# Altium PCB T7.PcbDoc
Units mm, origin at the board's own origin, x right, y up, seen from the top; angles counter-clockwise.
Board outline 152.4 x 101.6 mm, 2 copper layers (Top Layer, Bottom Layer); 35 components, 52 nets, 226 pads, 10 vias.
Unrouted connection lines stored in the file: 1.
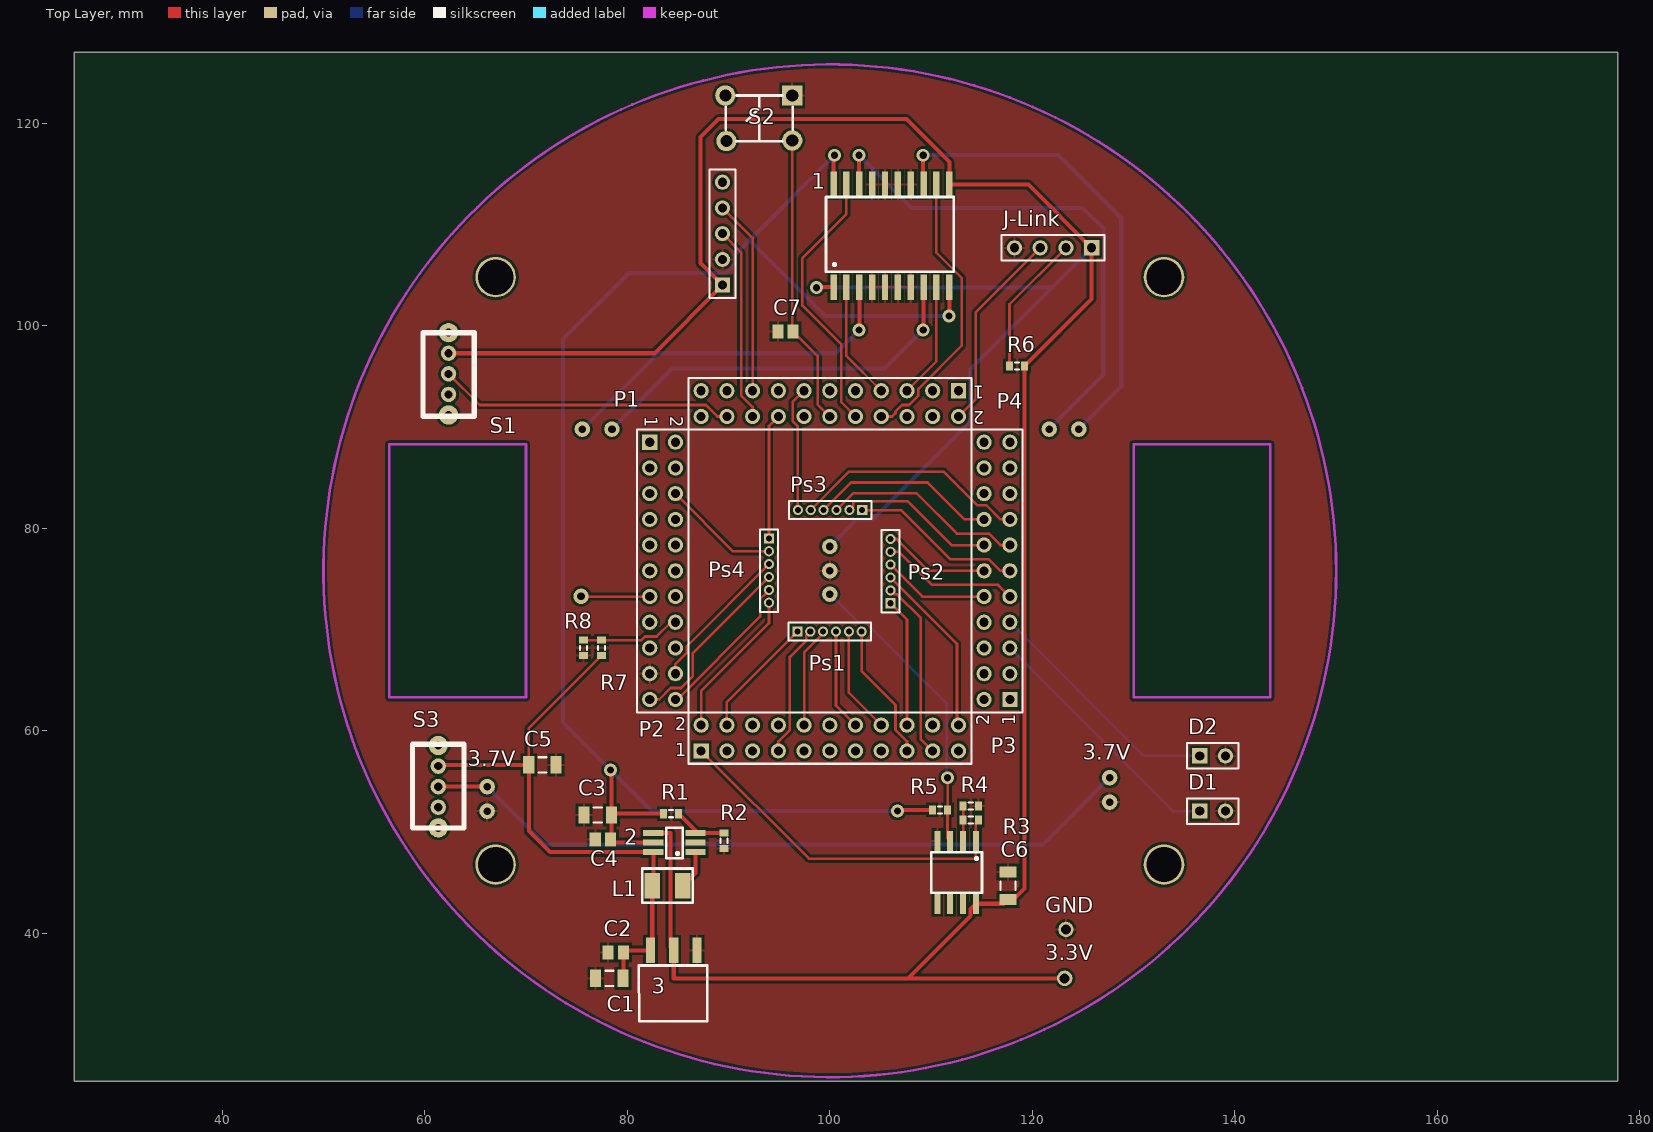
[diagram p0: Top Layer view]
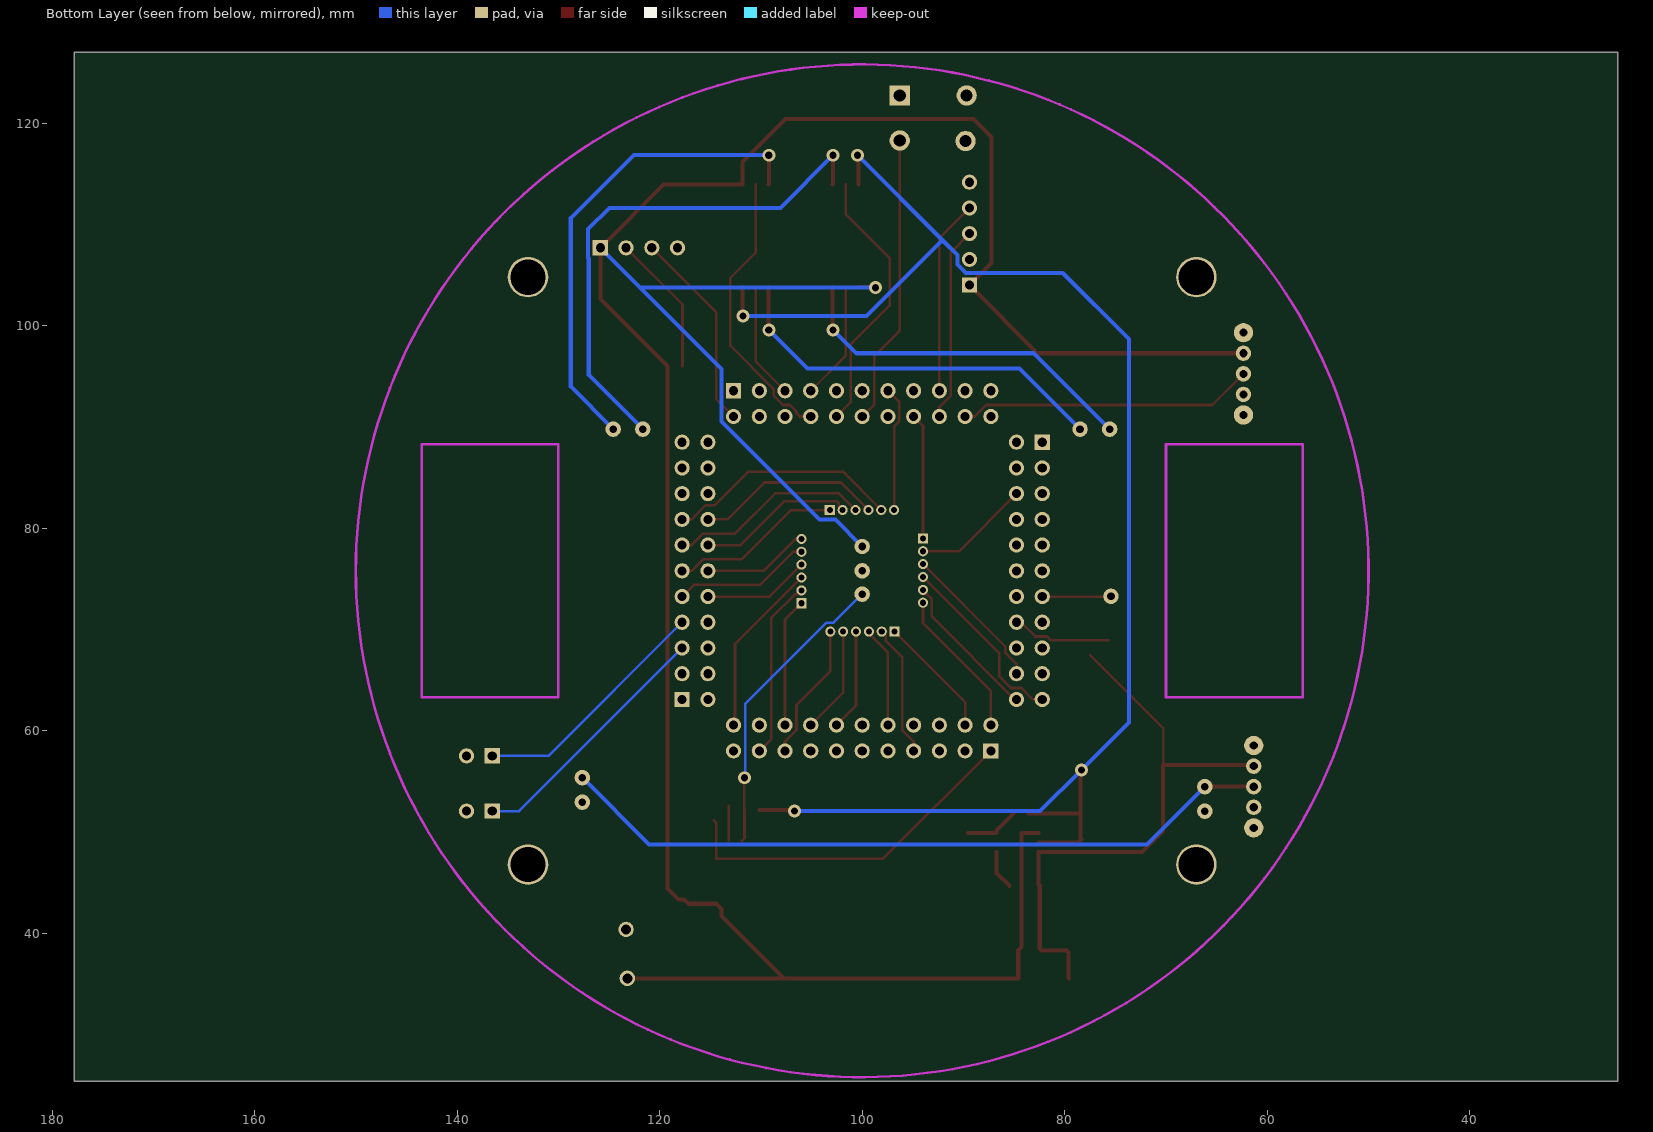
[diagram p1: Bottom Layer view, seen from below]

## Layer stack, top to bottom
Top Solder: solder mask 0.0102, Solder Resist, Dk 3.5
Top Layer: signal copper 0.0356
Dielectric 1: dielectric 0.32, FR-4, Dk 4.8
Bottom Layer: signal copper 0.0356
Bottom Solder: solder mask 0.0102, Solder Resist, Dk 3.5

## Board outline
25.4,25.4 177.8,25.4 177.8,127 25.4,127

## Design rules (kind name [scope] priority, off if disabled: settings)
Clearance [All] p1: gap=0.254
PolygonConnect [All] p1: connectstyle=Relief reliefconductorwidth=0.254 reliefentries=4 polygonreliefangle="90 Angle" airgapwidth=0.254
RoomDefinition SheetT7 [InComponentClass('SheetT7')] p1: confinementstyle=ConfineOut formatcopy=TRUE lockcomponents=FALSE outline 182.118,40.64 200.787,40.64 200.787,54.356 182.118,54.356
RoutingVias [All] p1: holewidth=0.711 width=1.27 viastyle="Through Hole" minholewidth=0.711 minwidth=1.27 maxholewidth=0.711 maxwidth=1.27
SolderMaskExpansion [All] p1: expansion=0.102
Width [All] p1: maxlimit=0.4 minlimit=0.254 preferedwidth=0.4
30 further rules are at their usual default settings.

## Classes and differential pairs
component class SheetT7: 1 2 3 C1 C2 C3 C4 C5 C6 C7 J-Link L1 P1 P2 P3 P4 Ps1 Ps2 Ps3 Ps4 R1 R2 R3 R4 R5 R6 R7 R8 S1 S2 S3 ""

## Components (designator, comment, footprint, x,y, rotation, side; value= is the part's Value field where it differs from the comment)
1 "L293D" L293D 105.537,109.347 r90 top
2 "PS7516" PS7516 85.471,50.419 r180 top
3 "ams1117" ams1117 87.884,36.83 r180 top
C1 "Cap Pol3" C1206 78.232,35.56 r180 top
C2 "Cap Semi" C0805 78.867,38.1 r0 top
C3 "Cap Pol3" C1206 77.089,51.689 r180 top
C4 "Cap Semi" C0805 77.597,49.276 r0 top
C5 "Cap Pol3" C1206 71.628,56.642 r0 top
C6 "Cap Pol3" C1206 117.602,44.704 r90 top
C7 "Cap Semi" C0805 95.631,99.441 r0 top
D1 "Diode 1N4001" HDR1X2 136.525,52.07 r0 top
D2 "Diode 1N4001" HDR1X2 136.525,57.531 r0 top
J-Link "Header 4" HDR1X4 125.857,107.696 r180 top
L1 "Inductor" L1 82.471,44.704 r0 top
P1 "Header 11X2" HDR2X11 82.22,88.5 r270 top
P2 "Header 11X2" HDR2X11 87.3,58.02 r0 top
P3 "Header 11X2" HDR2X11 117.78,63.1 r90 top
P4 "Header 11X2" HDR2X11 112.7,93.58 r180 top
P5 "Header 5" HDR1X5 89.408,104.013 r90 top
Ps1 "MHDR1X6" MHDR1X6 96.8,69.8 r0 top
Ps2 "MHDR1X6" MHDR1X6 106,72.6 r90 top
Ps3 "MHDR1X6" MHDR1X6 103.2,81.8 r180 top
Ps4 "MHDR1X6" MHDR1X6 94,79 r270 top
R1 "Res3" J1-0603 84.328,51.816 r180 top
R2 "Res3" J1-0603 89.535,49.149 r90 top
R3 "Res3" J1-0603 113.919,51.181 r0 top
R4 "Res3" J1-0603 113.919,52.578 r180 top
R5 "Res3" J1-0603 110.871,52.197 r180 top
R6 "Res3" J1-0603 118.491,96.012 r180 top
R7 "Res3" J1-0603 77.47,68.199 r270 top
R8 "Res3" J1-0603 75.692,68.199 r90 top
S1 "SW-SPDT" SW1 62.484,94.869 r270 top
S2 "SW-PB" SW2 96.289,122.737 r180 top
S3 "SW-SPDT" SW1 61.214,54.864 r90 top
? "LM358" LM358 110.027,48.026 r270 top

## Footprints (in the part's own frame and the unit in brackets; to place one, negate y for a bottom-side part, rotate by r counter-clockwise, add the part's x,y. Pads: shape width x height; smd on the part's side, far side on the other; paste and mask are expansions set on the pad)
ams1117 [mm]
  rect 0.9x2.5 smd: 1(1,-1.5) 2(3.29,-1.5) 3(5.58,-1.5)
  silkscreen extent 0,0 6.73,5.5
C0805 [mm] "Chip Capacitor, Body 2.0x1.3mm, IPC High Density"
  rect 1.1x1.4 smd: 1(-0.75,0) 2(0.75,0)
  body extent -1.1,-0.72 1.1,0.72, height 1.4
C1206 [mm] "Chip Capacitor, Body 3.2x1.6mm, IPC High Density"
  rect 1.1x1.7 smd: 1(-1.35,0) 2(1.35,0)
  silkscreen extent -0.4,-0.75 0.4,0.75, body extent -1.7,-0.9 1.7,0.9, height 1.3
HDR1X2 [mm] "Connector; Header; 2 Position"
  rect 1.5x1.5 hole 0.9: 1(0,0)
  round 1.5 hole 0.9: 2(2.54,0)
  silkscreen extent -1.27,-1.27 3.81,1.27
HDR1X4 [mm] "Connector; Header; 4 Position"
  rect 1.5x1.5 hole 0.9: 1(0,0)
  round 1.5 hole 0.9: 2(2.54,0) 3(5.08,0) 4(7.62,0)
  silkscreen extent -1.27,-1.27 8.89,1.27
HDR1X5 [mm] "Connector; Header; 5 Position"
  rect 1.5x1.5 hole 0.9: 1(0,0)
  round 1.5 hole 0.9: 2(2.54,0) 3(5.08,0) 4(7.62,0) 5(10.16,0)
  silkscreen extent -1.27,-1.27 11.43,1.27
HDR2X11 [mm] "Connector; Header; 11x2 Position"
  rect 1.5x1.5 hole 0.9: 1(0,0)
  round 1.5 hole 0.9: 2(0,2.54) 3(2.54,0) 4(2.54,2.54) 5(5.08,0) 6(5.08,2.54) 7(7.62,0) 8(7.62,2.54) 9(10.16,0) 10(10.16,2.54) 11(12.7,0) 12(12.7,2.54) 13(15.24,0) 14(15.24,2.54) 15(17.78,0) 16(17.78,2.54) 17(20.32,0) 18(20.32,2.54) 19(22.86,0) 20(22.86,2.54) 21(25.4,0) 22(25.4,2.54)
  silkscreen extent -1.27,-1.27 26.67,3.81
J1-0603 [mm] "Chip Resistor, Body 1.6x0.8mm, IPC High Density"
  rect 0.7x0.9 smd: 1(-0.75,0) 2(0.75,0)
  silkscreen extent -0.2,-0.35 0.2,0.35, body extent -0.85,-0.48 0.85,0.48, height 0.9
L1 [mm]
  rect 1.5x2.5 smd: 1(0,0) 2(3,0)
  silkscreen extent -1,-1.7 4,1.7
L293D [mm]
  rect 2.54x0.635 smd: 1(-5.537,5.165) 2(-5.537,3.895) 3(-5.537,2.625) 4(-5.537,1.355) 5(-5.537,0.085) 6(-5.537,-1.185) 7(-5.537,-2.455) 8(-5.537,-3.725) 9(-5.537,-4.995) 10(-5.537,-6.265) 11(4.603,-6.265) 12(4.603,-4.995) 13(4.603,-3.725) 14(4.603,-2.455) 15(4.603,-1.185) 16(4.603,0.085) 17(4.603,1.355) 18(4.603,2.625) 19(4.603,3.895) 20(4.603,5.165)
  silkscreen extent -4.04,-6.69 3.36,5.91
LM358 [mm]
  rect 2x0.6 smd: 1(-1.1,4.4) 2(-1.1,3.13) 3(-1.1,1.86) 4(-1.1,0.59) 5(5.1,0.59) 6(5.1,1.86) 7(5.1,3.13) 8(5.1,4.4)
  silkscreen extent 0,0 4,5
MHDR1X6 [mm] "Connector; Header; 6 Position"
  rect 1x1 hole 0.6: 1(0,0)
  round 1 hole 0.6: 2(1.27,0) 3(2.54,0) 4(3.81,0) 5(5.08,0) 6(6.35,0)
  silkscreen extent -0.9,-0.9 7.25,0.9
PS7516 [mm] "BGA, 81-Leads, Body 11.00x11.00mmx3.50mm, Pitch 1.00mm"
  rect 2x0.6 smd: 1(-1.27,2.4) 2(-1.27,1.45) 3(-1.27,0.5) 4(2.9,0.5) 5(2.9,1.45) 6(2.9,2.4)
  silkscreen extent 0,0 1.6,3
SW1 [mil]
  round 75 hole 31.5: 0(-175,-5) 0(145,-5)
  round 60 hole 31.5: 1(-95,-5) 2(-15,-5) 3(65,-5)
  silkscreen extent -175,-105 150,95
SW2 [mm]
  rect 2x2 hole 1.2: 1(0,0)
  round 2 hole 1.2: 2(0,4.445) 3(6.604,0) 4(6.5,4.5)
  silkscreen extent -0.05,0 6.55,4.5

## Part data
C1 C3 C5 C6: "Polarized Capacitor (Surface Mount)"
C2 C4 C7: "Capacitor (Semiconductor SIM Model)"
D1 D2: "1 Amp General Purpose Rectifier"
J-Link: "Header, 4-Pin"
P1 P2 P3 P4: "Header, 11-Pin, Dual row"
P5: "Header, 5-Pin"
Ps1 Ps2 Ps3 Ps4: "Header, 6-Pin"
R1 R2 R3 R4 R5 R6 R7 R8: "Resistor"
S1 S3: "SPDT Subminiature Toggle Switch, Right Angle Mounting, Vertical Actuation"
S2: "Switch"

## Free pads (board coordinates)
  round 1.524 hole 0.762: 0(100,73.5) 0(100,78.2) 0(100,75.8) 3(75.438,73.279) 5(75.565,89.789) 5(121.666,89.789) 6(78.486,89.789) 6(124.587,89.789) 9(66.167,54.483) 9(127.635,55.372) 10(66.167,52.07) 10(127.635,52.959)
  round 4 hole 3.5: 2(67,46.8) 2(67,104.8) 2(133,46.8) 2(133,104.8)
  round 1.524 hole 1: 7(123.19,35.56) 8(123.317,40.386)

## Via types
v1: diameter 1.27, hole 0.711, Top Layer to Bottom Layer, 10 vias

## Nets (pads, with @x,y where several pads share a name; then routed paths per layer and width w, separated by ;. In a path a pad name is that pad's centre, name@x,y a point inside that pad or via, vN(x,y) a via of type N, cw(c..) or ccw(c..) an arc to the next point about the centre after c; other vN are vias at no path point)
3.3V: 1.1 1.11 2.4 3.2 ?.8 C6.1 J-Link.1 P5.1 pad.0@100,78.2 pad.7 R6.1 S1.1 | length 293.7
  Top Layer w0.4: S1.1 82.677,97.282 P5.1 87.249,106.172 87.249,118.618 89.027,120.396 107.569,120.396 111.802,116.163 1.11 119.603,113.95 J-Link.1 125.857,102.628 R6.1 119.241,44.438 118.157,43.354 C6.1 117.174,42.926 ?.8 113.911,42.41 113.911,41.738 107.733,35.56 ; 2.4 84.267,49.919 84.267,38.657 3.2 84.594,35.548 107.315,35.548 107.327,35.56 107.733,35.56 ; v1(98.679,103.759) 98.73,103.81 1.1 ; pad.7 107.733,35.56
  Bottom Layer w0.4: v1(98.679,103.759) 121.92,103.759 ; pad.0@100,78.2 102.646,80.846 104.209,80.846 113.904,90.541 113.904,95.743 121.92,103.759 ; J-Link.1 121.92,103.759
3.7V: pad.9 S3.2 | length 71.4
  Top Layer w0.4: S3.2 pad.9@66.167,54.483
  Bottom Layer w0.4: pad.9@66.167,54.483 71.882,48.768 121.031,48.768 pad.9@127.635,55.372
5V: 1.10 1.20 2.5 C3.1 C4.2 R1.2 R5.2 | length 158
  Top Layer w0.4: v1(78.359,56.134) 78.439,56.054 C3.1 ; 2.5 78.654,48.969 C4.2 78.439,49.368 C3.1 ; R1.2 78.566,51.816 C3.1 ; 1.20 100.372,116.755 v1(100.457,116.84) ; v1(106.68,52.07) 106.807,52.197 R5.2 ; v1(111.76,100.965) 111.802,101.007 1.10
  Bottom Layer w0.4: v1(100.457,116.84) 91.948,108.331 ; v1(106.68,52.07) 82.423,52.07 v1(78.359,56.134) 73.66,60.833 73.66,98.679 80.198,105.217 89.775,105.217 90.612,106.054 90.612,106.995 91.948,108.331 ; v1(111.76,100.965) 99.568,100.965 92.202,108.331 91.948,108.331
GND: 1.4 1.5 1.6 1.7 1.14 1.15 1.16 1.17 2.2 3.1 ?.4 C1.2 C2.1 C3.2 C4.1 C5.2 C6.2 C7.1 D1.2 D2.2 J-Link.4 P1.19 P5.2 pad.0@100,75.8 pad.8 pad.10 R2.1 R4.1 R8.1 S2.1
M1+: 1.3 pad.5@75.565,89.789 | length 35.6
  Top Layer w0.4: v1(102.87,99.568) 102.912,99.61 1.3
  Bottom Layer w0.4: pad.5@75.565,89.789 83.058,97.282 100.584,97.282 v1(102.87,99.568)
M1-: 1.8 pad.6@78.486,89.789 | length 39
  Top Layer w0.4: v1(109.22,99.568) 109.262,99.61 1.8
  Bottom Layer w0.4: pad.6@78.486,89.789 84.455,95.758 105.41,95.758 v1(109.22,99.568)
M2+: 1.18 pad.5@121.666,89.789 | length 52.1
  Top Layer w0.4: v1(102.87,116.84) 102.87,113.992 1.18
  Bottom Layer w0.4: v1(102.87,116.84) 108.077,111.633 124.968,111.633 127.061,109.54 127.061,106.697 127,106.636 127,95.123 pad.5@121.666,89.789
M2-: 1.13 pad.6@124.587,89.789 | length 47.6
  Top Layer w0.4: v1(109.22,116.84) 109.22,113.992 1.13
  Bottom Layer w0.4: v1(109.22,116.84) 122.555,116.84 128.778,110.617 128.778,93.98 pad.6@124.587,89.789
Net1_2: 1.2 P4.7 | length 11.7
  Top Layer w0.254: 1.2 101.642,97.018 P4.7
Net1_9: 1.9 P4.5 | length 11.4
  Top Layer w0.254: P4.5 110.532,96.492 1.9
Net1_12: 1.12 P4.8 | length 28.3
  Top Layer w0.254: P4.8 106.153,91.04 106.489,91.376 106.489,91.508 107.152,92.171 107.81,92.171 108.751,93.112 108.751,93.77 113.03,98.049 113.03,104.708 110.532,107.206 1.12
Net1_19: 1.19 P4.10 | length 26.9
  Top Layer w0.254: 1.19 101.642,111.04 97.282,106.68 97.282,101.981 101.134,98.129 101.134,92.446 P4.10
Net2_1: 2.1 L1.2 | length 3.8
  Top Layer w0.4: L1.2 86.741,45.974 2.1
Net2_3: 2.3 R1.1 R2.2 | length 5.4
  Top Layer w0.4: R1.1 86.741,50.153 2.3 86.761,49.899 R2.2
Net2_6: 2.6 3.3 C1.1 C2.2 C5.1 L1.1 R7.2 S3.3 | length 57.6
  Top Layer w0.254: C5.1 70.278,60.257 R7.2
  Top Layer w0.4: S3.3 61.468,56.642 C5.1 70.278,50.118 72.377,48.019 2.6 82.571,44.804 L1.1 82.471,38.497 3.3 79.847,38.33 C2.2 79.617,35.595 C1.1
Net_1: ?.1 P2.1 R3.2 | length 35.4
  Top Layer w0.254: P2.1 97.949,47.371 114.427,47.371 ?.1 114.427,50.939 R3.2
Net_2: ?.2 R3.1 R4.2 | length 3.5
  Top Layer w0.254: ?.2 113.169,49.138 R3.1 R4.2
NetC7_2: C7.2 P4.12 S2.2 | length 28.8
  Top Layer w0.254: S2.2 96.289,99.533 C7.2 98.806,97.016 98.806,92.234 P4.12
NetD1_1: D1.1 P3.5 | length 25.4
  Bottom Layer w0.254: P3.5 133.89,52.07 D1.1
NetD2_1: D2.1 P3.7 | length 24.2
  Bottom Layer w0.254: P3.7 130.969,57.531 D2.1
NetJ-Link_2: J-Link.2 P3.21 R6.2 | length 14
  Top Layer w0.254: R6.2 117.741,102.12 J-Link.2
NetJ-Link_3: J-Link.3 P4.2 | length 20
  Top Layer w0.254: P4.2 114.427,92.767 114.427,101.346 J-Link.3
NetP1_6: P1.6 Ps4.2 | length 11.6
  Top Layer w0.254: P1.6 90.45,77.73 Ps4.2
NetP1_16: P1.16 R7.1 R8.2 | length 9.8
  Top Layer w0.254: R8.2 R7.1 81.39,68.949 81.752,69.311 82.9,69.311 84.309,70.72 P1.16
NetP1_20: P1.20 Ps4.3 | length 14.6
  Top Layer w0.254: P1.20 84.76,66.581 85.891,67.712 85.891,68.351 Ps4.3
NetP1_21: P1.21 Ps4.4 | length 18.1
  Top Layer w0.254: P1.21 83.161,63.1 84.292,64.231 85.313,64.231 86.487,65.405 86.487,67.677 Ps4.4
NetP1_22: P1.22 Ps4.5 | length 15
  Top Layer w0.254: P1.22 84.944,63.1 93.119,71.275 93.119,73.015 93.635,73.531 94,73.531 Ps4.5
NetP2_2: P2.2 Ps4.6 | length 14.9
  Top Layer w0.254: P2.2 87.3,63.932 94,70.632 Ps4.6
NetP2_4: P2.4 Ps1.1 | length 12.1
  Top Layer w0.254: P2.4 89.84,62.84 Ps1.1
NetP2_7: P2.7 Ps1.2 | length 13.1
  Top Layer w0.254: P2.7 94.92,58.961 96.051,60.092 96.051,67.289 97.681,68.919 97.681,69.411 Ps1.2
NetP2_10: P2.10 Ps1.3 | length 10
  Top Layer w0.254: P2.10 97.46,67.742 99.34,69.622 Ps1.3
NetP2_14: P2.14 Ps1.4 | length 10
  Top Layer w0.254: Ps1.4 100.61,62.49 P2.14
NetP2_16: P2.16 Ps1.5 | length 10.6
  Top Layer w0.254: Ps1.5 101.88,63.76 P2.16
NetP2_17: P2.17 Ps1.6 | length 13.6
  Top Layer w0.254: Ps1.6 103.15,65.887 106.489,62.548 106.489,60.092 107.62,58.961 P2.17
NetP2_18: P2.18 Ps2.1 | length 12.7
  Top Layer w0.254: Ps2.1 107.62,70.98 P2.18
NetP2_19: P2.19 Ps2.2 | length 17.7
  Top Layer w0.254: Ps2.2 106.389,73.481 106.658,73.481 108.966,71.173 108.966,59.214 P2.19
NetP2_22: P2.22 Ps2.3 | length 17.4
  Top Layer w0.254: Ps2.3 112.56,68.58 112.56,60.7 P2.22
NetP3_9: P3.9 Ps2.5 | length 13.6
  Top Layer w0.254: Ps2.5 106.851,77.68 110.109,74.422 116.618,74.422 P3.9
NetP3_10: P3.10 Ps2.4 | length 10.5
  Top Layer w0.254: Ps2.4 109.15,73.26 P3.10
NetP3_11: P3.11 Ps3.1 | length 17.1
  Top Layer w0.254: Ps3.1 107.049,81.8 111.918,76.931 115.708,76.931 116.839,75.8 P3.11
NetP3_12: P3.12 Ps2.6 | length 10.5
  Top Layer w0.254: Ps2.6 106.597,78.95 109.747,75.8 P3.12
NetP3_13: P3.13 Ps3.3 | length 19.9
  Top Layer w0.254: Ps3.3 102.299,83.439 108.585,83.439 112.553,79.471 115.708,79.471 116.839,78.34 P3.13
NetP3_14: P3.14 Ps3.2 | length 15.7
  Top Layer w0.254: Ps3.2 102.319,82.189 102.319,82.501 102.499,82.681 107.692,82.681 112.033,78.34 P3.14
NetP3_15: P3.15 Ps3.5 | length 23.2
  Top Layer w0.254: Ps3.5 101.918,85.598 111.24,85.598 114.549,82.289 115.45,82.289 116.859,80.88 P3.15
NetP3_16: P3.16 Ps3.4 | length 18.5
  Top Layer w0.254: Ps3.4 102.108,84.518 109.665,84.518 113.303,80.88 P3.16
NetP4_13: P4.13 Ps3.6 | length 12.5
  Top Layer w0.254: Ps3.6 96.85,90.051 96.329,90.572 96.329,92.449 P4.13
NetP4_16: P4.16 Ps4.1 | length 12.4
  Top Layer w0.254: Ps4.1 94,90.12 P4.16
NetP4_17: P4.17 P5.4 | length 19.3
  Top Layer w0.254: P5.4 92.38,108.661 P4.17
NetP4_18: P4.18 P5.3 | length 19.3
  Top Layer w0.254: P5.3 91.249,107.252 91.249,93.112 92.38,91.981 P4.18
NetP4_20: P4.20 S1.2 | length 29.2
  Top Layer w0.254: S1.2 65.436,92.171 87.768,92.171 88.899,91.04 P4.20
VCC2: ?.3 pad.0@100,73.5 R5.1 | length 29.7
  Top Layer w0.254: v1(111.633,55.372) 111.633,52.209 R5.1 111.621,49.392 ?.3
  Bottom Layer w0.254: pad.0@100,73.5 102.819,70.681 103.515,70.681 111.569,62.627 111.569,55.436 v1(111.633,55.372)
VOUT: P1.13 pad.3 | length 6.8
  Top Layer w0.254: pad.3 75.457,73.26 P1.13
pads on no net: ?.5 ?.6 ?.7 P1.1 P1.2 P1.3 P1.4 P1.5 P1.7 P1.8 P1.9 P1.10 P1.11 P1.12 P1.14 P1.15 P1.17 P1.18 P2.3 P2.5 P2.6 P2.8 P2.9 P2.11 P2.12 P2.13 P2.15 P2.20 P2.21 P3.1 P3.2 P3.3 P3.4 P3.6 P3.8 P3.17 P3.18 P3.19 P3.20 P3.22 P4.1 P4.3 P4.4 P4.6 P4.9 P4.11 P4.14 P4.15 P4.19 P4.21 P4.22 P5.5 S1.0 S1.3 S2.3 S2.4 S3.0 S3.1

## Polygon pours and split planes (outlines as drawn)
GND on Top Layer "Top Layer-No Net" (solid, remove dead copper, pour order 8): 172.339,135.509 171.704,136.144 40.767,136.144 40.767,26.924 50.673,17.018 51.054,17.399 159.004,17.399

## Keep-outs
Keep-Out Layer:
  circle w0.254: c100,75.8 r50
  lines w0.254: 56.5,63.3 70,63.3 70,88.3 56.5,88.3 56.5,63.3 ; 130,63.3 130,88.3 143.5,88.3 143.5,63.3 130,63.3

## Silkscreen, mask and mechanical layers (free items; w line width, h text height)
Top Overlay:
  text "3.7V" at 124.968,57.15 h1.52
  text "3.7V" at 64.262,56.515 h1.52
  text "GND" at 121.285,42.037 h1.52
  text "3.3V" at 121.285,37.338 h1.52

## Text inside footprints (layer, text, board x,y; h text height)
P1: Top Overlay "2" at 84.252,91.04 h1.27 r270; Top Overlay "1" at 81.712,91.04 h1.27 r270
P2: Top Overlay "2" at 84.76,60.052 h1.27; Top Overlay "1" at 84.76,57.512 h1.27
P3: Top Overlay "2" at 115.748,60.56 h1.27 r90; Top Overlay "1" at 118.288,60.56 h1.27 r90
P4: Top Overlay "2" at 115.24,91.548 h1.27 r180; Top Overlay "1" at 115.24,94.088 h1.27 r180